# Altium PCB DCDC_POWER_SUPPLY_V2.PcbDoc (part 3 of 3)
Units mm, origin at the board's own origin, x right, y up, seen from the top; angles counter-clockwise.
Board outline 41 x 24.5 mm, 4 copper layers (Top Layer, GND 1, GND 2, Bottom Layer), stack 0.603 mm thick; 49 components, 29 nets, 141 pads, 132 vias.
Unrouted connection lines stored in the file: 1.
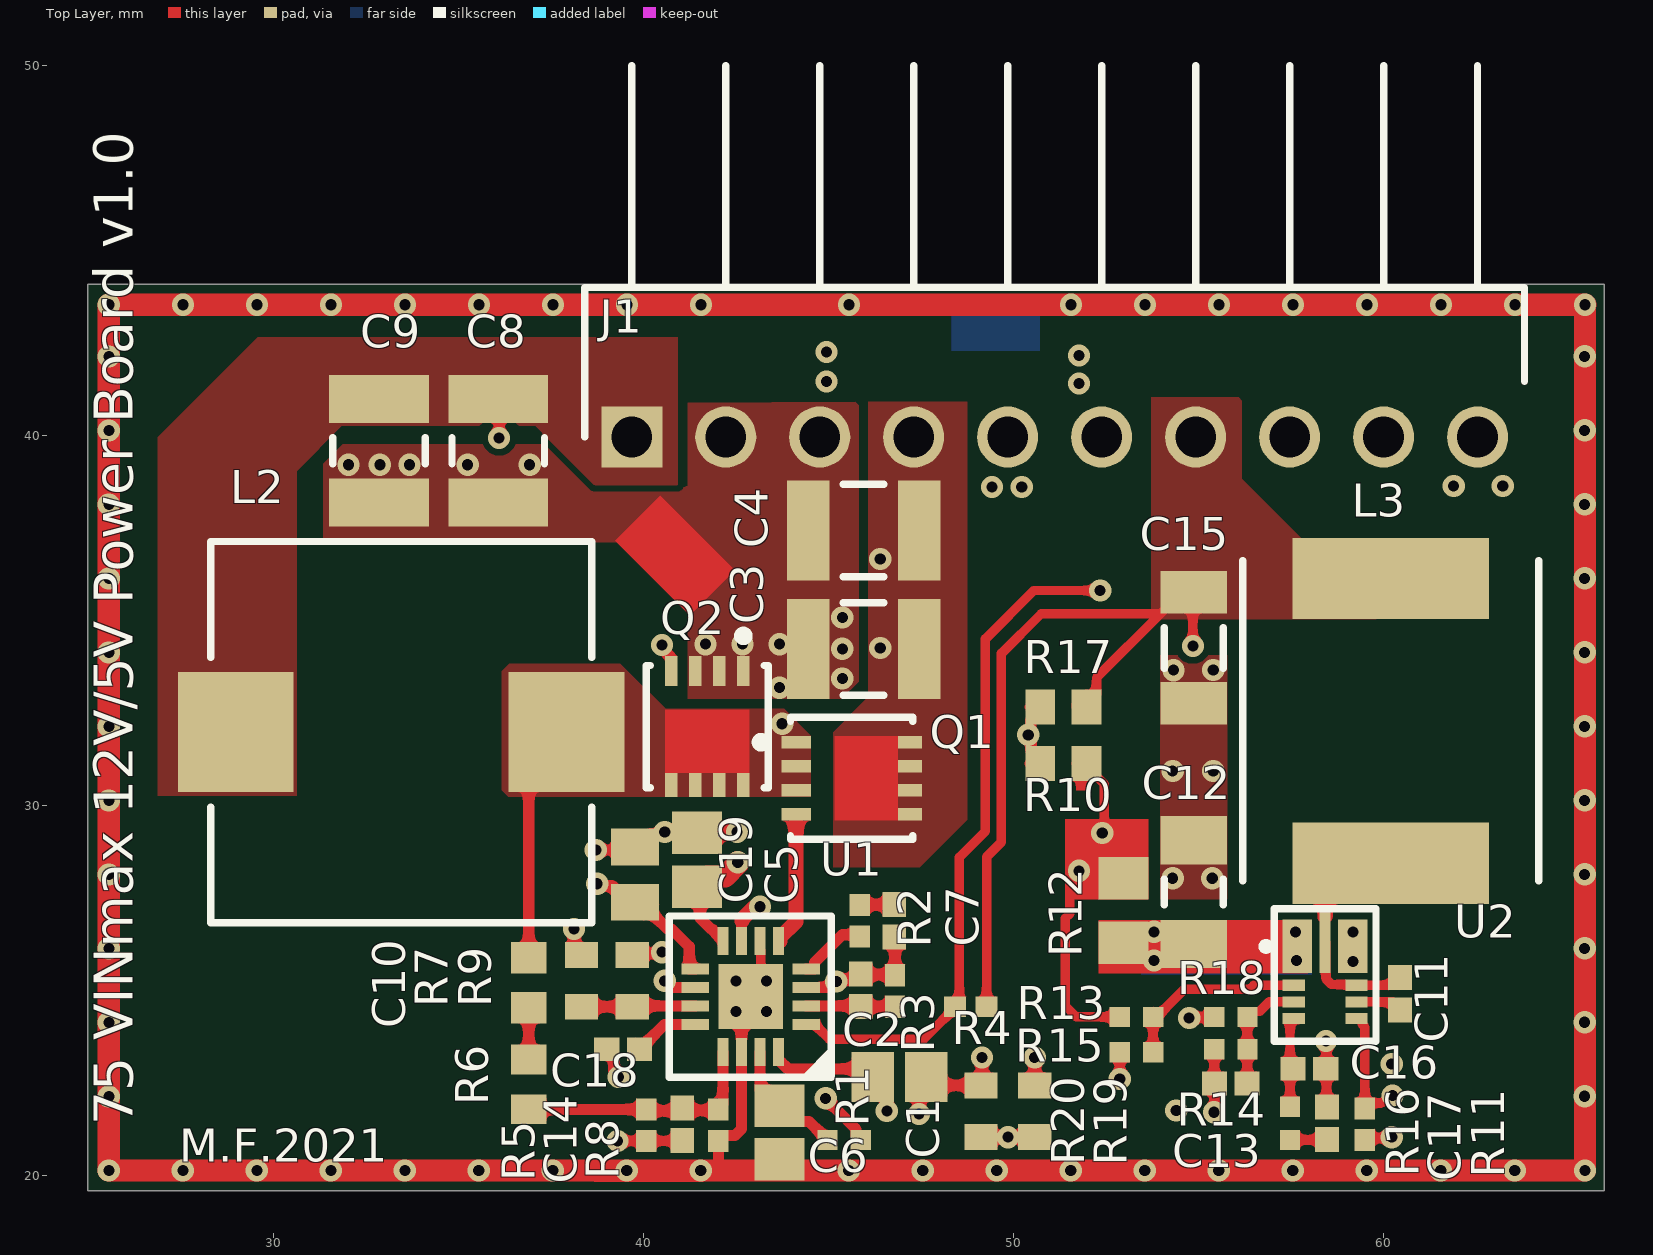
[diagram p0: Top Layer view]

## Via types
v1: diameter 0.6, hole 0.3, Top Layer to Bottom Layer, tented both sides, 132 vias

## Nets (pads, with @x,y where several pads share a name; then routed paths per layer and width w, separated by ;. In a path a pad name is that pad's centre, name@x,y a point inside that pad or via, vN(x,y) a via of type N, cw(c..) or ccw(c..) an arc to the next point about the centre after c; other vN are vias at no path point) (continued)
GND: (continued)
  Top Layer w0.3: C18.1 39.03,23.4 39.2,23.23 39.2,22.856 39.325,22.731 v1(39.325,22.65) ; 42.025,20.125 42.025,20.675 R8.1@42.025,20.8 ; R8.1 R8.1@42.025,20.8 ; v1(42.5,24.425) 42.65,24.275 U1.14 42.65,21.251 42.474,21.075 42.15,21.075 42.025,20.95 R8.1@42.025,20.8 ; v1(47.45,21.653) 47.45,22.125 47.75,22.425 C1.1@47.85,22.425 ; C1.1 47.85,22.45 C1.1@47.85,22.425 ; v1(49.15,23.175) 49.15,22.45 R20.1 C1.1@47.85,22.425
  Top Layer w0.4: C5.1 41.463,29.263 42.513,29.263 v1(42.525,29.275)
  Top Layer w0.6: v1@25.557,43.524 38.732,43.524 38.74,43.516 41.575,43.516 41.583,43.524 42.032,43.524 43.682,43.524 58.957,43.524 v1@65.457,43.524 ; v1(25.55,20.125) v1(25.55,43.525) v1(65.45,43.525) v1(65.45,20.125) 58.95,20.125 43.675,20.125 42.025,20.125 41.576,20.125 41.568,20.117 38.733,20.117 38.725,20.125 v1(25.55,20.125)
  GND 2 w0.6: v1@25.557,43.524 38.732,43.524 42.032,43.524 58.957,43.524 v1@65.457,43.524 ; v1(25.55,20.125) v1(25.55,43.525) v1(65.45,43.525) v1(65.45,20.125) 58.95,20.125 42.025,20.125 38.725,20.125 v1(25.55,20.125)
  other v1: 27.55,20.125 29.55,20.125 31.55,20.125 33.55,20.125 35.55,20.125 37.55,20.125 39.55,20.125 41.55,20.125 45.55,20.125 47.55,20.125 49.55,20.125 51.55,20.125 53.55,20.125 55.55,20.125 57.55,20.125 59.55,20.125 61.55,20.125 63.55,20.125 54.4,21.75 25.55,22.125 65.441,22.13 60.225,23 25.55,24.125 65.441,24.13 43.325,24.425 42.5,25.25 59.175,25.775 25.55,26.125 65.441,26.13 59.175,26.575 54.305,28.025 55.375,28.025 25.55,28.125 65.441,28.13 25.55,30.125 65.441,30.13 54.305,30.925 55.4,30.925 25.55,32.125 65.441,32.13 43.675,33.175 45.375,33.425 54.328,33.647 55.4,33.65 25.55,34.125 65.441,34.13 45.375,34.225 41.675,34.35 42.675,34.35 43.675,34.35 45.375,35.075 25.55,36.125 65.441,36.13 25.55,38.125 65.441,38.13 49.425,38.6 50.225,38.6 61.9,38.625 63.225,38.625 32.025,39.2 32.875,39.2 33.675,39.2 35.25,39.2 36.925,39.2 25.55,40.125 65.441,40.13 51.775,41.4 44.95,41.45 25.55,42.125 51.775,42.15 65.441,42.13 44.95,42.25 27.557,43.524 29.557,43.524 31.557,43.524 33.557,43.524 35.557,43.524 37.557,43.524 39.557,43.524 41.557,43.524 45.557,43.524 51.557,43.524 53.557,43.524 55.557,43.524 57.557,43.524 59.557,43.524 61.557,43.524 63.557,43.524
NetC2_1: C2.1 C7.1 C10.2 L2.1 Q1.1 Q1.2 Q1.3 Q2.5 Q2.6 Q2.7 Q2.8 R3.1 U1.3 | length 17.6
  Top Layer w0.3: C10.2 36.9,30.954 L2.1 ; U1.3 44.973,25.075 45.131,25.233 v1(45.213,25.233) ; v1@45.222,25.222 45.291,25.291 45.746,25.291 C2.1@45.845,25.39 ; C2.1 45.895,25.42 46.73,25.42 R3.1@46.737,25.413 ; C7.1 46.8,26.41 R3.1
  GND 2 w0.6: v1(43.75,32.2) 45.213,30.737 v1(45.213,25.233)
NetC2_2: C2.2 R3.2 U1.2 | length 2.4
  Top Layer w0.3: U1.2 45.86,24.575 C2.2 45.88,24.555 46.745,24.555 R3.2@46.75,24.55
NetC5_2: C5.2 R1.2 U1.8 | length 14.2
  Top Layer w0.3: C5.2 41.525,27.725 41.525,26.95 41.825,26.65 41.85,26.65 U1.8@42.075,26.425 ; v1(44.925,22.075) 45.737,21.263 45.737,21.251 45.75,21.237 45.75,21.075 R1.2
  Top Layer w0.6: C5.2 41.725,28.075 42.201,28.075 42.55,28.424 v1(42.55,28.457)
  GND 2 w0.6: v1(42.55,28.457) 42.55,28.425 41.475,27.35 41.475,23.225 42.675,22.025 44.875,22.025 v1(44.925,22.075)
NetC6_2: C6.2 R1.1 U1.15 | length 3.4
  Top Layer w0.3: U1.15 43.15,22.3 43.6,21.85 C6.2@43.7,21.85 ; C6.2 44.1,21.45 44.475,21.45 44.85,21.075 R1.1
NetC7_2: C7.2 R2.1 | length 1.1
  Top Layer w0.2: C7.2@46.54,27.5 C7.2@46.725,27.315
  Top Layer w0.3: R2.1 45.858,27.308 46.717,27.308 C7.2@46.725,27.315
NetC10_1: C10.1 R6.2 | length 1.4
  Top Layer w0.3: R6.2 C10.1
NetC11_1: C11.1 L3.1 U2.7 U2.9 | length 4.9
  Top Layer w0.254: U2.9 58.448,26.296 58.448,25.301 58.597,25.152 59.102,25.152 59.123,25.131 60.257,25.131 60.45,25.324 C11.1
  Top Layer w0.4: U2.9@58.425,26.975 58.425,27.875 L3.1@59,28.45
NetC11_2: C11.2 U2.6 | length 1.3
  Top Layer w0.254: U2.6 60.249,24.681 60.45,24.48 C11.2
NetC12_2: C12.2 R12.1 U2.1 | length 11.4
  Top Layer w0.254: R12.1@52.427,25.727 52.427,25.827 52.875,26.275 R12.1 R12.1@52.956,26.256 ; v1(53.8,25.8) 53.95,25.8 v1@53.975,25.825 ; v1(53.8,26.575) 54.8,26.575 C12.2@55.125,26.25 ; C12.2@54.7,25.825 54.7,26.075 C12.2 54.425,25.8 53.975,25.8 54.75,25.8 C12.2@55.125,26.175 ; U2.1@57.625,26.232 v1(57.625,26.575) ; v1(57.65,25.8) 57.675,25.825 U2.1
  Bottom Layer w0.254: v1(53.8,25.8) v1(53.8,26.575) 54.575,26.575 54.987,26.162 55.762,26.162 ; v1@53.8,25.825 53.875,25.9 55.762,25.9 56.025,26.162
NetC13_1: C13.1 R14.1 R18.2 U2.3 | length 3.2
  Top Layer w0.254: C13.1 56.32,22.48 56.32,23.4 56.32,24.27 56.473,24.423 56.653,24.423 56.911,24.681 U2.3
NetC14_1: C14.1 R5.1 R6.1 R8.2 U1.13 | length 7
  Top Layer w0.3: R6.1 R5.1 ; R5.1@40.075,21.738 40.973,21.738 C14.1 41.115,21.75 41.925,21.75 R8.2@42.025,21.65 ; R8.2@41.9,21.675 42.15,21.925 U1.13
NetC16_2: C16.2 R16.2 U2.4 | length 2.4
  Top Layer w0.254: R16.2 57.475,24.125 U2.4@57.575,24.225
NetC17_2: C17.2 R16.1 | length 1
  Top Layer w0.254: R16.1 57.48,20.955 58.47,20.955 C17.2
NetC18_2: C18.2 U1.12 | length 1.8
  Top Layer w0.3: C18.2 39.91,23.4 40.08,23.57 40.08,23.58 40.575,24.075 U1.12
NetC19_2: C19.2 R10.2 R17.2 U1.9 | length 32.9
  Top Layer w0.3: v1(38.75,27.875) 38.807,27.818 39.182,27.818 39.625,27.375 39.925,27.375 40.647,26.653 40.76,26.653 41.238,26.175 41.238,25.575 U1.9 ; R10.2@50.45,31.125 50.725,31.4 50.525,31.4 50.475,31.45 50.475,31.694 50.457,31.711 50.457,31.843 v1(50.4,31.9) 50.4,31.981 50.475,32.056 50.475,32.325 50.625,32.475 50.588,32.512 R17.2@50.45,32.65
  GND 2 w0.508: 36.25,35.825 46.475,35.825 v1(50.4,31.9)
  GND 2 w0.6: 36.25,35.825 35.6,35.175 35.6,28.226 35.951,27.875 v1(38.75,27.875)
NetJ1_9: J1.9 R4.2 U1.1 | length 31.4
  Top Layer w0.254: U1.1 44.625,24.075 45.025,23.675 47.575,23.675 R4.2@48.275,24.375 ; R4.2 48.538,24.663 48.538,28.588 49.243,29.293 49.243,34.493 50.55,35.8 v1(52.345,35.8)
  GND 2 w0.254: v1(52.345,35.8) 52.345,36.695 53.775,38.125 53.775,40.8 54.7,41.725 58.55,41.725 60.005,40.27 J1.9
NetJ1_10: J1.10 R11.1 U2.5 | length 23.7
  Top Layer w0.254: 59.425,24.075 59.5,24 R11.1 R11.1 59.648,21.95 59.956,21.95 60.156,22.15 v1(60.25,22.15)
  GND 2 w0.254: v1(60.25,22.15) 61.2,23.1 61.5,23.1 64.45,26.05 64.45,36.375 62.545,38.28 J1.10@62.545,39.925
NetL1_2: L1.2 R21.1
NetQ1_4: Q1.4 U1.5 | length 3.5
  Top Layer w0.4: U1.5@43.7,26.325 43.7,26.425 44.125,26.85 Q1.4@44.125,29.675
NetQ2_4: Q2.4 U1.7 | length 10.4
  Top Layer w0.3: v1(40.5,34.325) 40.5,34.244 40.73,34.014 40.73,33.645 Q2.4 ; U1.7 42.65,26.858 42.663,26.871
  Top Layer w0.4: 42.663,26.871 42.663,26.92 42.959,27.216 43.112,27.216 v1(43.15,27.254)
  GND 2 w0.6: v1(40.5,34.325) 40.5,33 43.404,30.096 43.404,27.508 v1(43.15,27.254)
NetR2_2: R2.2 U1.4 | length 1.8
  Top Layer w0.3: U1.4 44.625,25.575 44.625,25.75 45.375,26.5 R2.2@45.7,26.5
NetR7_2: R7.2 R9.2 U1.11 | length 3.1
  Top Layer w0.3: R7.2 R9.2 39.888,24.55 39.913,24.575 U1.11
NetR13_1: R13.1 R15.2 U2.2 | length 5.1
  Top Layer w0.254: R15.2 R13.1 ; R13.1@53.775,24.175 54.628,25.028 56.394,25.028 56.497,25.131 U2.2
V_5: C13.2 C15.2 J1.7 L3.2 R4.1 R11.2 R14.2 R17.1 | length 63.2
  Top Layer w0.254: R4.1 49.275,28.6 49.675,29 49.675,34.1 50.75,35.175 53.975,35.175 ; R17.1@51.7,32.65 51.7,32.725 51.973,32.998 R17.1@51.975,32.998 ; R17.1 R17.1@51.975,32.998 ; v1(54.85,34.3) 54.85,35.725 C15.2 54.55,35.75 53.975,35.175 ; v1(55.425,21.7) 55.435,21.71 C13.2 55.43,22.48 55.43,23.395 R14.2 ; R11.2 59.548,20.998 60.198,20.998 v1(60.225,21.025) ; R17.1@51.975,32.998 52.248,32.998 52.248,33.448 53.975,35.175
  GND 2 w0.254: v1(54.85,34.3) 54.125,34.3 53.7,33.875 53.7,27.33 53.15,26.78 53.15,24.875 57,21.025 v1(60.225,21.025) ; J1.7 54.925,38.5 53.15,36.725 53.15,27.55 52.5,26.9 52.5,24.625 54.625,22.5 v1(55.425,21.7)
V_12: C8.2 C9.2 C14.2 J1.1 L2.2 R5.2 R10.1 R12.2 R13.2 | length 50.5
  Top Layer w0.254: C8.2 36.1,40.95 v1(36.1,39.925) ; v1(39.3,20.925) 41.04,20.925 C14.2 ; R10.1@51.7,31.125 R10.1@51.825,31 ; v1(51.775,28.225) 52.15,28.225 52.5,28.225 52.525,28.25 52.525,29.25 52.46,29.315 52.46,30.565 52.05,30.975 51.825,30.975 R10.1 ; 52.15,28.2 51.527,27.577 51.527,27.069 51.4,26.942 51.4,24.575 51.7,24.275 R13.2 ; v1(52.4,29.25) v1@52.475,29.175 ; R12.2@52.475,28.587 52.475,28.473 52.923,28.025 R12.2
  GND 2 w0.254: v1(36.1,39.925) 29.225,39.925 26.4,37.1 26.4,26.175 31.725,20.85 v1@39.3,20.85
V_PV: C1.2 C3.2 C4.2 C21.2 J1.4 L1.1 Q1.5 Q1.6 Q1.7 Q1.8 R7.1 R19.2 U1.16 | length 46.6
  Top Layer w0.3: v1(38.125,26.65) 38.125,26.15 R7.1 ; U1.16@43.725,23.05 43.904,22.871 45.775,22.871 C1.2@46.098,22.548 ; C1.2 46.579,22.271 v1(46.579,21.729) ; R19.2 v1(50.575,23.175)
  GND 2 w0.3: v1(38.125,26.65) 35.401,26.65 34.75,27.301 34.75,35.575 35.825,36.65 v1(46.4,36.65)
  GND 2 w0.6: v1(46.4,34.25) 47.305,33.345 47.305,24.63 ; v1(46.579,21.729) 46.579,23.904 47.305,24.63 ; v1(50.575,23.175) 50.575,23.575 49.725,24.425 47.305,24.425 47.305,24.63
V_PVin: J1.5 R21.2
pads on no net: L1.0

## Polygon pours and split planes (outlines as drawn)
V_12 on Top Layer "NONET_L-01_P-001" (solid, pour order 15): 30.625,30.25 30.625,39.025 31.85,40.25 37.075,40.25 38.675,38.65 40.925,38.65 40.925,42.65 29.575,42.65 26.875,39.95 26.875,30.25
NetC2_1 on Top Layer "NETC2_1_L01_P010" (solid, pour order 10): 44.525,30.225 36.35,30.225 36.175,30.4 36.175,33.625 36.375,33.825 39.375,33.825 40.6,32.6 43.8,32.6 44.525,31.875
GND on Top Layer "NONET_L-01_P-001" (solid, pour order 17): 45.85,40.9 45.85,33.375 45.35,32.875 41.2,32.875 41.2,40.875
GND on Top Layer "NONET_L-01_P-001" (solid, pour order 16): 31.35,37.1 31.35,39.225 31.875,39.75 40.1,39.75 41.775,38.075 41.775,37.1
V_PV on Top Layer "V_PV_L01_P011" (solid, pour order 11): 48.75,40.9 48.75,29.6 47.475,28.325 45.125,28.325 45.125,31.975 46.075,32.925 46.075,40.9
GND on Top Layer "GND_L01_P009" (solid, pour order 9): 53.975,34.05 55.775,34.05 55.775,27.45 53.975,27.45
V_5 on Top Layer "V_5_L01_P001" (solid, remove dead copper, pour order 1): 53.725,35.025 53.725,41.025 56.175,41.025 56.175,38.825 59.975,35.025
V_PV on Bottom Layer "NONET_L-01_P-001" (solid, pour order 21): 46.275,43.575 47.425,43.575 47.425,42.275 48.325,41.375 48.325,39.05 46.45,39.05 46.275,39.225
GND on Bottom Layer "NONET_L-01_P-001" (solid, pour order 22): 25.25,43.825 65.75,43.825 65.75,19.825 25.25,19.825
V_PVin on Bottom Layer "NONET_L-01_P-001" (solid, pour order 14): 50.725,39.075 50.725,42.025 49.3,42.025 48.95,41.675 48.95,39.075
GND on GND 2 "NONET_L-01_P-001" (solid, pour order 20): 41.1,43.825 53.4,43.825 53.4,38.3 41.1,38.3
V_12 on GND 2 "NONET_L-01_P-001" (solid, pour order 12): 52.725,27.875 52.725,33.575 47.425,38.875 41.175,38.875 40.7,39.35 40.7,40.925 38.65,40.925 38.65,38.675 39.95,37.375 46.55,37.375 50.95,32.975 50.95,27.875
GND on GND 1 "NONET_L-01_P-001" (solid, pour order 13): 25.25,43.825 65.75,43.825 65.75,19.825 25.25,19.825

## Other copper
Top Layer:
  region net GND: 41.25,35.125 42.475,36.35 40.45,38.375 39.225,37.15
  rectangle net V_12: 51.4,27.45 53.65,29.625
  region net NetC12_2: 57.275,25.475 57.735,25.935 57.416,26.253 56.957,25.793
  rectangle net NetC12_2: 52.3,25.45 57.95,26.9
GND 2:
  rectangle net GND: 42.025,23.95 43.775,25.7
Bottom Layer:
  rectangle net NetL1_2: 48.325,42.275 50.725,43.575
  rectangle net NetC12_2: 53.45,25.425 58.075,26.9

## Silkscreen, mask and mechanical layers (free items; w line width, h text height)
Top Overlay:
  lines w0.2: 57.05,23.623 59.8,23.623 59.8,27.2 57.05,27.2 57.05,23.623
  text "75 VINmax 12V/5V Power Board v1.0" at 26.553,21.35 h1.8 r90
  text "M.F.2021" at 27.45,20.069 h1.52
Mechanical 1:
  the board outline again, w0.254